# Altium PCB Main_conection.PcbDoc (part 2 of 3)
Units mm, origin at the board's own origin, x right, y up, seen from the top; angles counter-clockwise.
Board outline 75.25 x 97.25 mm, 4 copper layers (Top Layer, Layer 1, Layer 2, Bottom Layer), stack 1.57 mm thick; 186 components, 91 nets, 471 pads, 242 vias.
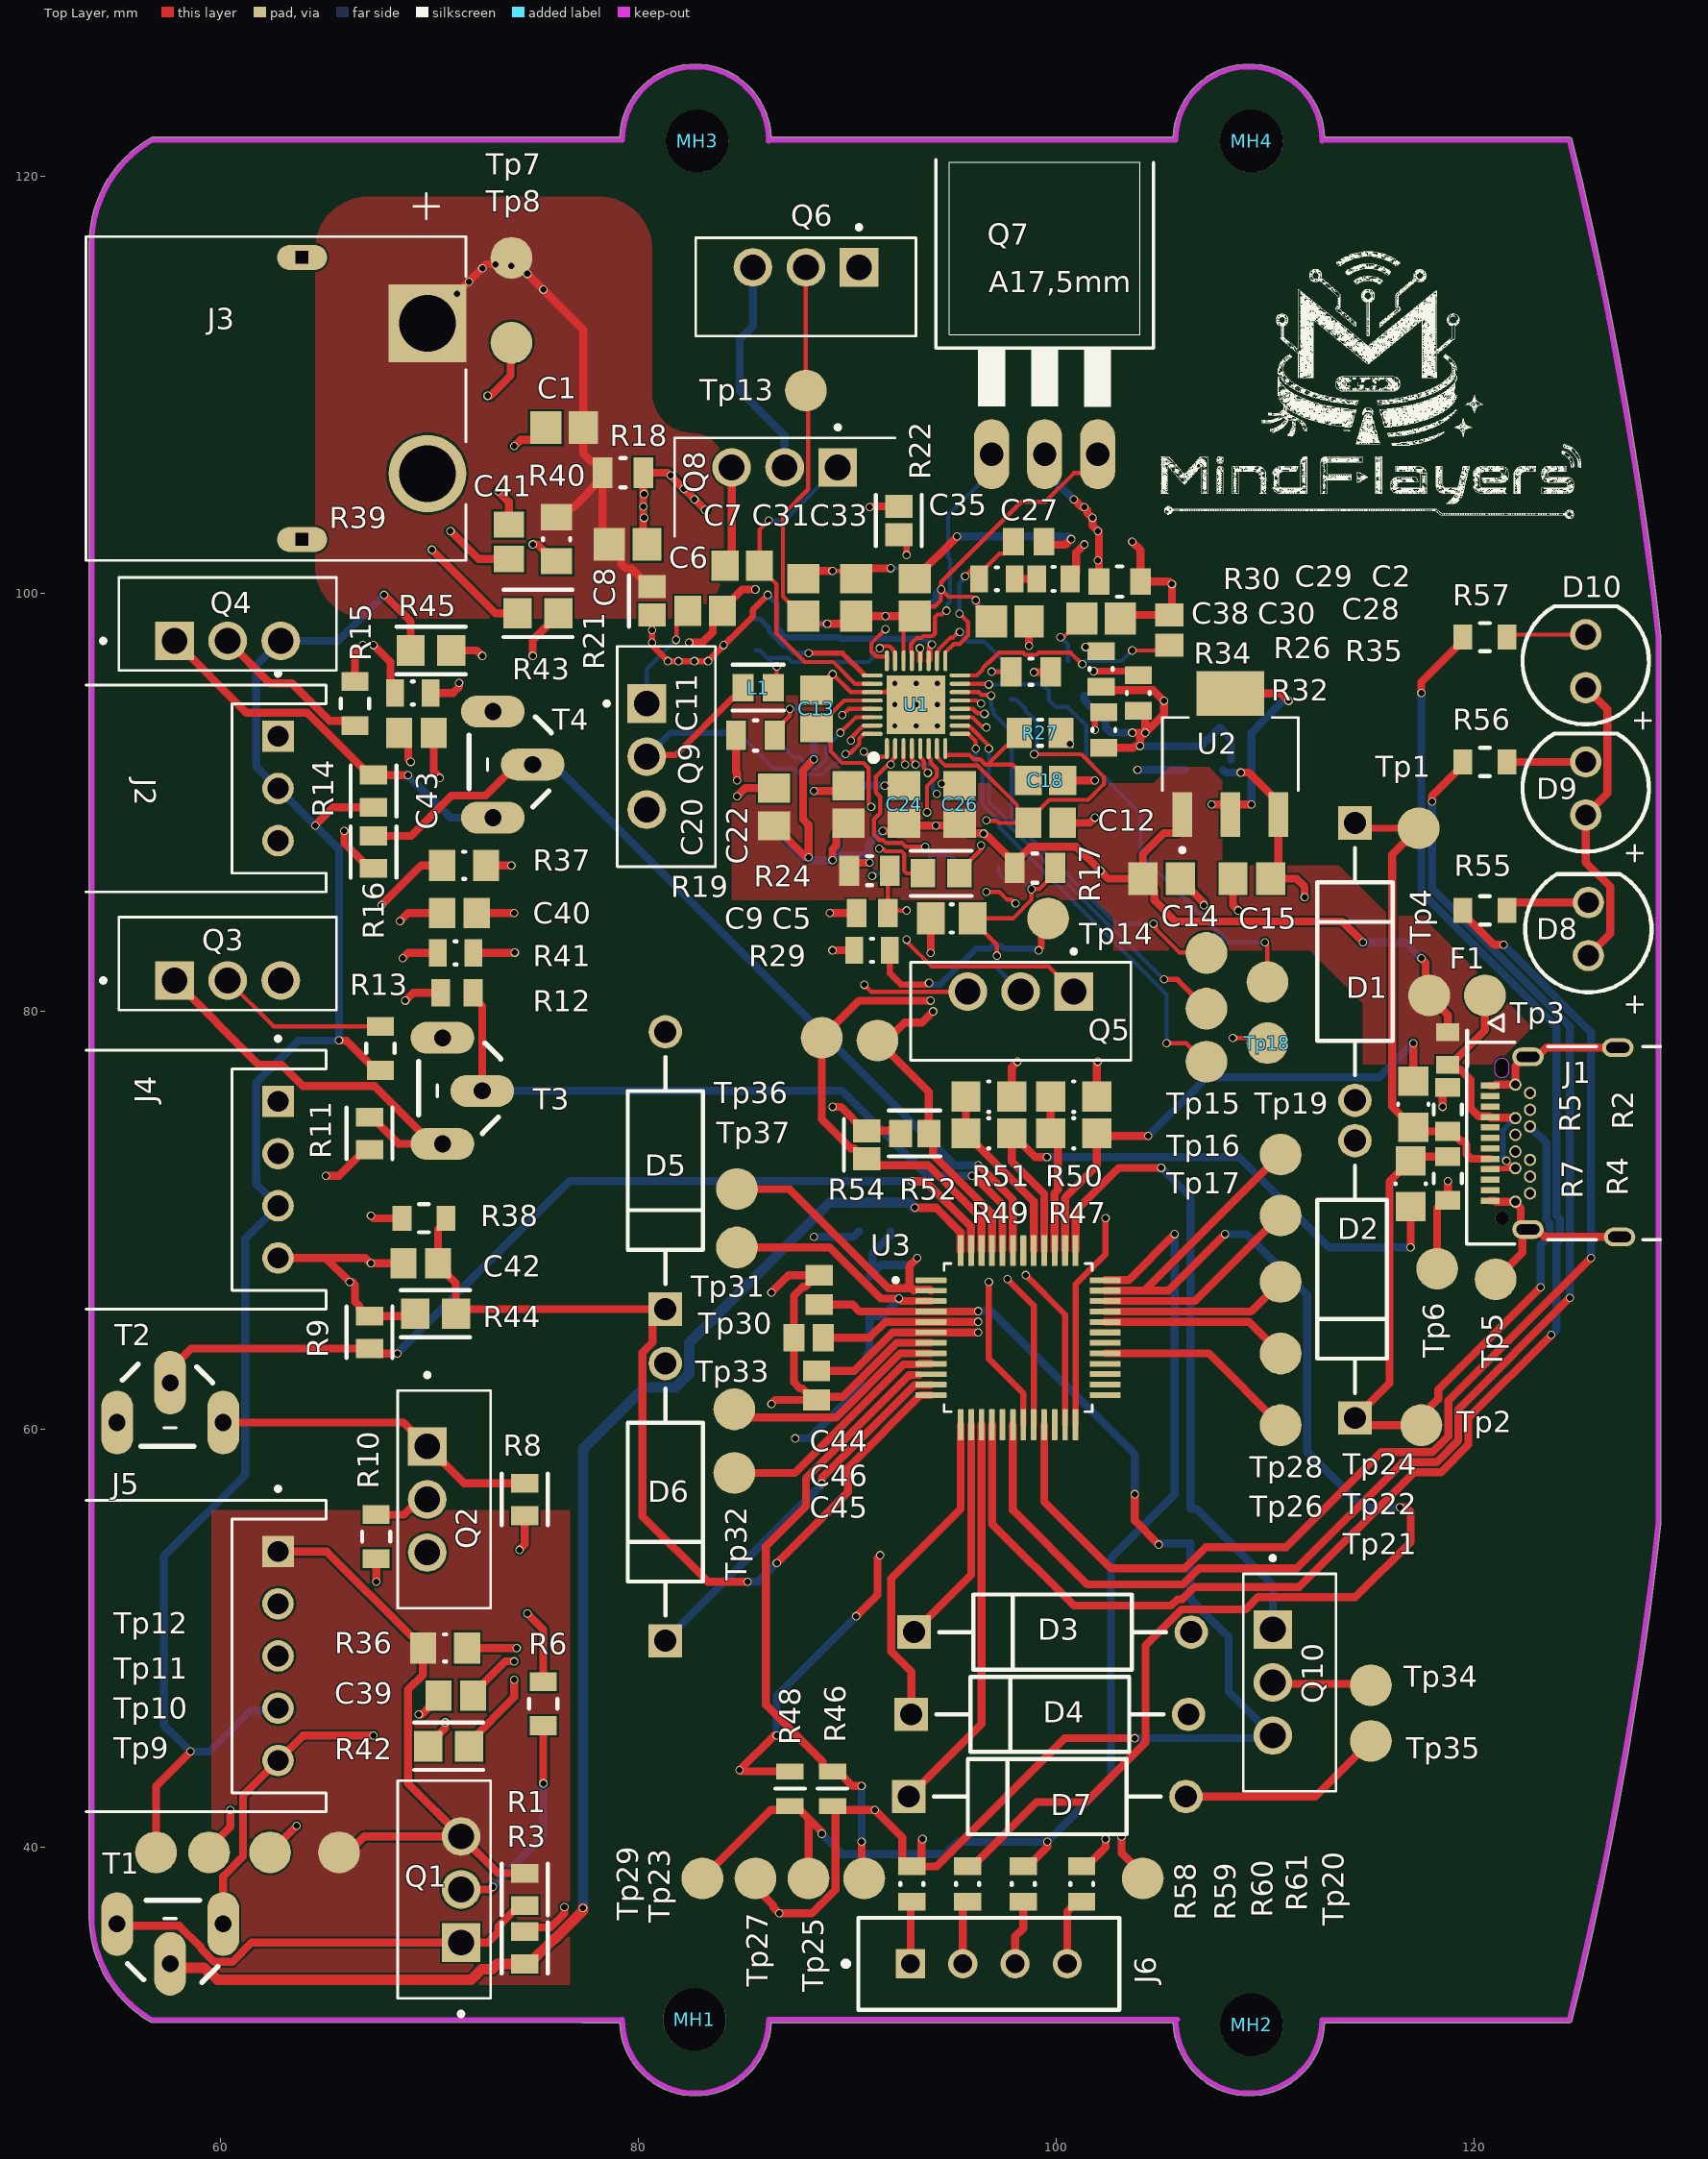
[diagram p0: Top Layer view]

## Part data (continued)
U2: "50-mA, 60-V, low-IQ, low-dropout voltage regulator with reverse voltage protection 4-SOT-223 -40 to 125", Package="SOT-223-4 Texas Instruments", Check_prices=https://www.snapeda.com/parts/LM2936MP-5.0/Texas+Instruments/view-part/?ref=eda, MF="Texas Instruments", MP=LM2936MP-5.0, SnapEDA_Link=https://www.snapeda.com/parts/LM2936MP-5.0/Texas+Instruments/view-part/?ref=snap
U3: "MCU 32-bit ARM Cortex M0+ RISC 128KB Flash 1.8V/2.5V/3.3V 48-Pin LQFP Tray", Ambient Temperature Range High=85°C, Case/Package=LFQFP, Clock Frequency=48MHz, Frequency=64MHz, Manufacturer=STMicroelectronics, Max Junction Temperature (Tj)=105°C, Max Supply Current=7mA, Max Supply Voltage=3.6V, Min Operating Temperature=-40°C, Min Supply Voltage=1.7V, Operating Supply Voltage=1.8V, Supplier Part Number=84AC2899, ADC Channels (Resolution)="14-Ch 12-Bit", Category=Microcontrollers, China RoHS=Compliant, ComponentLink1Description=https://datasheet.octopart.com:443/STM32G071CBT6-STMicroelectronics-datasheet-159144893.pdf?src-supplier=IHS, ComponentLink1URL=https://datasheet.octopart.com:443/STM32G071CBT6-STMicroelectronics-datasheet-159144893.pdf?src-supplier=IHS, ComponentLink2Description=https://datasheet.octopart.com:443/STM32G071CBT6-STMicroelectronics-datasheet-132344621.pdf?src-supplier=ODG+(Origin+Data+Global), ComponentLink2URL=https://datasheet.octopart.com:443/STM32G071CBT6-STMicroelectronics-datasheet-132344621.pdf?src-supplier=ODG+(Origin+Data+Global), ComponentLink3Description=https://datasheet.octopart.com:443/STM32G071CBT6-STMicroelectronics-datasheet-130125765.pdf?src-supplier=element14+APAC, ComponentLink3URL=https://datasheet.octopart.com:443/STM32G071CBT6-STMicroelectronics-datasheet-130125765.pdf?src-supplier=element14+APAC, Core Architecture="ARM Cortex-M0+", Country of Origin="Mainland China", DAC Channels (Resolution)="2-Ch 12-Bit", Data Bus Width=32b, EEPROM Memory Size=0B, Export Control Classification Number (ECCN) Code=3A991.A.2, Flash Memory Size=128kB, Harmonized Tariff Schedule (HTS) Code=8542.31.00.25, Height=1.6mm, Height - Seated (Max)=1.6mm, Interface=I2S, Introduction Date=2019-03-07, Length=7mm, Lifecycle Status=Production, Manufacturer Part Number=STM32G071CBT6, Max Operating Temperature=85°C, Memory Format=FLASH, Memory Size=128kB, Number of A/D Converters=1, Number of ADC Channels=17, Number Of Channels=14, Number of D/A Converters=2, Number of I2C Channels=2, Number of I/Os=5, Number of Interrupts=44, Number of SPI Channels=2, Number of Terminals=48, Number of Timers/Counters=12, Number of UART Channels=0, Number of USART Channels=4, Number of USB Channels=2, Peripherals="POR, PWM, WDT", Pricing="1=3.97, 10=3.29, 25=3.08, 50=2.97, 100=2.86, 250=2.76, 500=2.69 (USD)", RAM Size=36kB, REACH SVHC=Yes, RoHS=Compliant, Schedule B="8542310000, 8542310000|8542310000, 8542310000|8542310000|8542310000|8542310000|8542310000", Stock=1757, Supplier=Avnet, Terminal Pitch=500µm, Width=7mm
Y1: library part CMP-2000-07595-1, "Crystal Unit, 8 MHz, 8 pF, -40 to 150 degC, 2-Pin SMD, RoHS, Tape and Reel", Case/Package=SMD/SMT, ESR (Equivalent Series Resistance)=500Ohm, Frequency=8MHz, Frequency Stability=150ppm, Frequency Tolerance=50ppm, Load Capacitance=8pF, Manufacturer=NDK, Max Operating Temperature=150degC, Min Operating Temperature=-40degC, Package Description="2-Pin Surface Mount Device, Body 3.2 x 2.5 mm", Package Quantity=3000, Datasheet URL=http://www.ndk.com/images/products/catalog/c_NX3225GD-STD-CRA-3_e.pdf, Datasheet Version=11/2016, Height=0.039inch, Length=0.126inch, Manufacturer URL=http://www.ndk.com/en/, Mount=SurfaceMount, Mounting Technology=SurfaceMount, Number of Pins=2, Package Reference=NX3225GD-8MHZ-STD-CRA-3, Packaging=TapeandReel, RoHSCompliant=True, Width=0.098inch

## Via types
v1: diameter 0.4, hole 0.3, Top Layer to Bottom Layer, 242 vias

## Nets (pads, with @x,y where several pads share a name; then routed paths per layer and width w, separated by ;. In a path a pad name is that pad's centre, name@x,y a point inside that pad or via, vN(x,y) a via of type N, cw(c..) or ccw(c..) an arc to the next point about the centre after c; other vN are vias at no path point)
3.3V: C15.2 C16.2 C17.2 C44.2 C45.2 C46.2 D8.1 D9.1 D10.1 Q10.3 R32.2 R33.2 R34.2 R35.2 R46.2 R52.2 R53.2 R54.2 R58.2 Tp27.1 U2.3 U3.4 U3.5 U3.6 | length 191.8
  Top Layer w0.381: Tp27.1@85.598,38.502 85.598,38.064 86.447,37.215 86.447,37.124 v1(86.741,36.83) 88.293,36.83 89.43,37.967 R46.2@89.43,41.823 ; C45.2@88.519,62.803 90.332,62.803 92.168,64.639 U3.6@94.001,64.639 96.262,64.639 v1(96.266,64.643) ; C44.2@88.646,65.975 90.242,65.975 90.578,65.639 U3.4@94.001,65.639 96.246,65.639 v1(96.266,65.659) ; C46.2@88.838,64.389 91.059,64.389 91.809,65.139 U3.5@94.001,65.139 96.254,65.139 v1(96.266,65.151) ; R46.2@89.281,41.972 89.459,41.972 89.648,41.783 90.17,41.783 v1(91.313,41.783) 92.631,40.465 92.631,39.312 92.866,39.077 R58.2@93.316,39.077 ; v1(89.289,75.438) 89.688,75.438 90.831,74.295 R54.2@90.932,74.295 92.415,74.295 R52.2@92.542,74.168 ; R46.2@89.47,41.783 90.16,41.783 ; v1(93.599,40.386) 93.599,40.381 93.551,40.332 93.551,39.312 R58.2@93.316,39.077 ; R35.2@102.149,95.543 102.309,95.383 104.642,95.383 v1(105.156,94.869) 105.156,94.234 v1(104.267,93.345) ; R32.2@102.276,92.622 103.671,92.622 103.759,92.71 v1(104.013,92.71) 104.013,93.091 v1(104.267,93.345) ; v1(103.632,93.345) v1(104.267,93.345) ; v1(103.759,45.212) 100.405,45.212 94.27,39.077 R58.2@93.316,39.077 ; v1(103.759,56.896) 103.759,55.626 v1(104.902,54.483) ; R34.2@103.927,94.4 104.032,94.4 104.267,94.165 v1(104.267,93.345) ; v1(108.831,91.44) 109.22,91.44 110.631,90.029 U2.3@110.631,89.429 110.631,86.733 C15.2@110.258,86.36 111.506,86.36 111.887,85.979 v1(111.887,85.471) ; D10.1@125.349,95.504 126.391,94.462 126.391,90.45 D9.1@125.349,89.408 125.349,87.148 126.518,85.979 126.518,83.719 D8.1@125.476,82.677
  Layer 2 w0.381: v1(89.289,75.438) 89.289,72.949 93.835,68.402 93.835,68.09 v1(96.266,65.659) v1(96.266,65.151) ; v1(96.266,64.643) v1(96.266,65.151) ; D8.1@125.476,82.677 122.682,85.471 v1(111.887,85.471) 111.887,78.232 98.806,65.151 v1(96.266,65.151)
  Bottom Layer w0.381: v1(96.266,65.659) 96.901,65.659 103.759,58.801 v1(103.759,56.896) ; R33.2@101.346,95.123 101.346,94.898 102.37,93.874 102.37,93.594 102.618,93.345 v1(103.632,93.345) ; v1(103.759,45.212) 110.236,45.212 Q10.3@110.363,45.339 108.254,47.448 108.254,50.042 106.426,51.87 R53.2@106.426,54.545 104.964,54.545 v1(104.902,54.483) ; v1(104.013,92.71) 106.967,92.71 ; 106.923,92.71 107.228,93.015 107.253,93.015 107.812,93.574 C17.2@107.812,93.599 108.372,93.039 C16.2@108.372,92.034 ; C16.2@107.972,91.567 108.099,91.44 v1(108.831,91.44)
12C1_SCL: R52.1 Tp37.1 U1.13 U3.45 | length 33.6
  Top Layer w0.2: U1.13@95.386,94.888 96.193,94.888 96.339,94.742 v1(96.393,94.742)
  Top Layer w0.381: v1(94.106,80.01) 93.563,79.466 92.731,79.466 91.878,78.613 Tp37.1@91.44,78.613 93.894,76.159 R52.1@93.894,74.168 94.093,73.969 94.093,73.166 96.921,70.338 U3.45@96.921,68.559
  Layer 1 w0.2: v1(94.106,80.01) 94.631,80.535 94.631,81.417 97.501,84.286 97.501,88.046 97.628,88.173 97.628,89.201 97.501,89.328 97.501,94.008 96.805,94.704 96.431,94.704 v1(96.393,94.742)
12C1_SDA: R54.1 Tp36.1 U1.12 U3.46 | length 38.1
  Top Layer w0.2: U1.12@95.386,94.488 96.006,94.488 96.208,94.286 96.527,94.286 v1(96.565,94.248)
  Top Layer w0.381: v1(93.98,80.518) 90.551,80.518 Tp36.1@88.773,78.74 88.773,74.834 90.157,73.45 90.323,73.45 90.831,72.942 R54.1@90.932,72.942 91.23,72.644 93.853,72.644 96.421,70.076 U3.46@96.421,68.559
  Layer 1 w0.2: v1(93.98,80.518) 94.33,80.868 94.33,81.542 94.631,81.843 94.631,84.31 97.199,86.878 97.199,88.17 97.326,88.297 97.326,89.076 97.199,89.203 97.199,92.724 96.844,93.078 96.602,93.078 96.247,93.433 96.247,93.929 v1(96.565,94.248)
\B\A\T\D\R\V\: Q7.G U1.21 | length 12.1
  Top Layer w0.2: U1.21@93.086,96.788 93.086,97.188 93.047,97.227 93.047,97.585 93.122,97.66 93.122,97.681 93.327,97.886 93.557,97.886 93.643,97.972 94.076,97.972 94.195,98.091 94.195,98.886 94.316,99.007 94.508,99.007 94.688,99.187 v1(94.742,99.187)
  Bottom Layer w0.2: v1(94.742,99.187) 94.78,99.225 94.78,99.484 94.913,99.617 94.913,101.653 94.825,101.741 94.825,103.766 96.901,105.842 Q7.G@96.901,106.68
\C\E\L\L\_\1\S\_\D\I\S\_\E\N\: Q4.1 R14.1 T4.3 | length 18.7
  Top Layer w0.381: Q4.1@57.785,97.742 61.227,94.3 64.135,94.3 67.108,91.327 R14.1@67.31,91.327 67.324,91.313 v1(68.961,91.313)
  Bottom Layer w0.381: v1(68.961,91.313) 70.993,89.281 T4.3@73.025,89.281
\C\E\L\L\_\2\S\_\D\I\S\_\E\N\: Q3.1 R11.1 T3.3 | length 20.1
  Top Layer w0.381: Q3.1@57.785,81.486 61.808,77.463 62.895,77.463 63.918,76.44 67.347,76.44 70.127,73.66 T3.3@70.612,73.66 68.516,73.66 67.576,74.6 67.576,74.682 67.314,74.944 R11.1@67.112,74.944
\C\E\L\L\_\3\S\_\D\I\S\_\E\N\: Q2.1 R8.1 T2.3 | length 15.6
  Top Layer w0.381: T2.3@60.112,60.325 68.738,60.325 Q2.1@69.881,59.182 71.645,57.418 R8.1@74.549,57.418
\C\E\L\L\_\4\S\_\D\I\S\_\E\N\: Q1.1 R1.1 T1.3 | length 21.6
  Top Layer w0.381: T1.3@55.032,36.322 55.12,36.233 58.008,36.233 59.059,35.182 59.059,35.124 59.677,34.506 60.548,34.506 61.475,35.433 Q1.1@71.501,35.433 72.785,35.433 73.279,35.927 73.279,36.206 74.007,36.934 74.286,36.934 R1.1@74.549,37.197
\P\R\O\C\H\O\T\: R32.1 U1.11 U3.20 | length 45.4
  Top Layer w0.2: U1.11@95.386,94.088 95.979,94.088 96.43,93.637 96.609,93.637 v1(96.647,93.599)
  Top Layer w0.3: v1(97.663,67.183) 98.921,65.925 U3.20@98.921,60.219 ; v1(101.854,93.472) 101.854,94.047 102.129,94.322 R32.1@102.276,94.322
  Layer 2 w0.3: v1(97.663,67.183) 98.679,68.199 98.679,78.905 97.121,80.463 97.121,81.437 98.679,82.995 98.679,83.831 97.568,84.942 97.568,85.368 97.846,85.646 98.023,85.646 98.331,85.955 98.331,88.548 98.609,88.826 98.609,91.42 97.122,92.907 97.122,93.124 v1(96.647,93.599) 96.674,93.599 96.827,93.752 101.547,93.752 101.827,93.472 v1(101.854,93.472)
ACP: C9.1 R19.1 U1.3 | length 10.9
  Top Layer w0.2: R19.1@92.034,86.741 91.936,86.643 C9.1@91.936,84.709 92.063,84.836 v1(92.837,84.836) ; U1.3@92.686,92.588 92.686,91.943 92.759,91.87 v1(92.759,91.816)
  Layer 1 w0.2: v1(92.759,91.816) 92.721,91.778 92.721,91.578 92.71,91.567 92.71,88.427 92.837,88.3 v1(92.837,84.836)
BAT: C1.2 C8.1 J3.1 R18.1 R21.2 R40.2 Tp7.1 | length 27.2
  Top Layer w0.381: J3.1@69.888,112.947 72.709,115.768 73.604,115.768 Tp7.1@73.914,116.078 77.354,112.638 C1.2@77.354,107.95 77.354,106.71 77.739,106.325 77.989,106.325 78.273,106.041 R18.1@78.273,105.791 R18.1@78.273,105.541 ; R40.2@76.073,103.666 76.508,104.101 76.833,104.101 R18.1@78.273,105.541 ; R21.2@80.645,100.33 80.544,100.33 79.655,101.219 79.385,101.219 79.162,101.442 79.162,101.802 78.273,102.691 R18.1@78.273,105.541
  other v1: 71.299,114.358 75.438,114.554 71.882,114.935 74.676,115.316 72.517,115.57 73.914,115.697 73.157,115.768
BAT_ADC: C41.2 D7.1 R40.1 R43.2 U3.15 | length 107
  Top Layer w0.381: v1(73.279,104.902) 73.787,104.394 C41.2@73.787,103.314 ; v1(74.93,97.028) 74.93,97.776 76.16,99.006 R43.2@76.16,99.06 ; v1(74.93,102.362) 75.152,102.362 75.948,101.566 R40.1@76.073,101.566 ; D7.1@92.93,42.418 96.421,45.909 U3.15@96.421,60.219
  Layer 2 w0.381: v1(74.93,97.028) v1(74.93,102.362) 74.93,103.251 v1(73.279,104.902) 71.509,103.132 71.509,97.821 69.969,96.282 69.969,89.292 73.525,85.736 73.525,78.337 76.119,75.743 76.119,59.228 D7.1@92.93,42.418
Blue_LED: R57.1 U3.16 | length 76.4
  Top Layer w0.381: U3.16@96.921,60.219 96.921,55.479 100.838,51.562 105.503,51.562 105.808,51.867 106.032,51.867 106.617,52.451 111.633,52.451 117.123,57.941 118.41,57.941 119.732,59.263 119.732,60.55 v1(123.698,64.516) ; v1(117.475,95.25) 117.475,95.769 119.473,97.767 R57.1@119.473,97.917
  Bottom Layer w0.381: v1(117.475,95.25) 117.475,85.725 123.952,79.248 123.952,70.23 124.107,70.075 124.107,69.061 123.952,68.906 123.952,64.77 v1(123.698,64.516)
BTST1: C3.2 U1.30 | length 6.9
  Top Layer w0.2: v1(89.662,93.345) 90.405,94.088 U1.30@91.186,94.088
  Bottom Layer w0.2: C3.2@86.475,93.345 86.475,93.145 87.459,92.161 87.704,92.161 88.216,91.65 88.568,91.65 88.983,92.065 88.983,92.636 89.275,92.927 89.275,92.958 v1(89.662,93.345)
BTST2: C4.2 U1.25 | length 6.4
  Top Layer w0.25: v1(88.138,97.155) 89.769,97.155 U1.25@90.811,96.113
  Bottom Layer w0.25: C4.2@85.598,98.794 85.798,98.794 86.257,98.335 86.257,98.19 86.927,97.52 87.072,97.52 87.437,97.155 v1(88.138,97.155)
CC1_IN: D1.1 J1.A5 R2.2 R5.2 Tp1.1 | length 23
  Top Layer w0.3: D1.1@114.3,89.027 114.554,88.773 Tp1.1@117.348,88.773
  Top Layer w0.381: Tp1.1@117.348,88.773 116.082,87.507 116.082,75.457 117.074,74.465 R2.2@117.094,74.465 117.298,74.261 118.895,74.261 119.355,73.801 119.466,73.801 119.637,73.63 119.637,73.171 119.86,72.948 J1.A5@120.772,72.948
CC2_IN: D2.1 J1.B5 R4.2 R7.2 Tp2.1 | length 35.8
  Top Layer w0.381: R7.2@118.745,73.059 117.171,73.059 R4.2@116.967,72.855 116.947,72.855 115.955,71.863 115.955,62.2 D2.1@114.3,60.545 114.647,60.198 Tp2.1@117.475,60.198 117.475,60.636 118.285,61.446 118.285,61.897 v1(123.19,66.802)
  Bottom Layer w0.381: J1.B5@122.682,74.498 123.469,73.711 123.469,70.03 123.624,69.875 123.624,69.261 123.19,68.827 v1(123.19,66.802)

## Text inside footprints (layer, text, board x,y; h text height)
D8: Top Overlay "+" at 128.143,79.756 h1 r90
D9: Top Overlay "+" at 128.143,86.995 h1 r90
D10: Top Overlay "+" at 128.524,93.345 h1 r90
J1: Mechanical 13 "PCB EDGE" at 128.522,79.368 h1.27 r90; Bottom Component Outline "PTH Slot 1.1 +/- 0.05 X 0.5 +/- 0.05" at 112.935,67.768 h0.5 r90; Bottom Component Outline "NPTH Slot 0.95 +/- 0.05 X 0.65 +/- 0.05" at 114.89,67.768 h0.5 r90; Bottom Component Outline "PTH Drill 0.4 +/- 0.05" at 113.951,67.768 h0.5 r90; Bottom Component Outline "NPTH Drill 0.65 +/- 0.05" at 115.93,67.768 h0.5 r90
J2: Mechanical 13 "PCB Edge" at 53.836,85.261 h0.81 r270
J4: Mechanical 13 "PCB Edge" at 53.836,65.282 h0.81 r270
J5: Mechanical 13 "PCB Edge" at 53.836,41.231 h0.81 r270
Q7: Top Overlay "A17,5mm" at 96.774,114.427 h1.02